# Altium PCB Signal_Integrity_4L.PcbDoc
Units mm, origin at the board's own origin, x right, y up, seen from the top; angles counter-clockwise.
Board outline 110 x 120 mm, 4 copper layers (Top Layer 1, GND1, Signal, Bottom Layer 1), stack 1.586 mm thick; 18 components, 16 nets, 78 pads, 1052 vias.
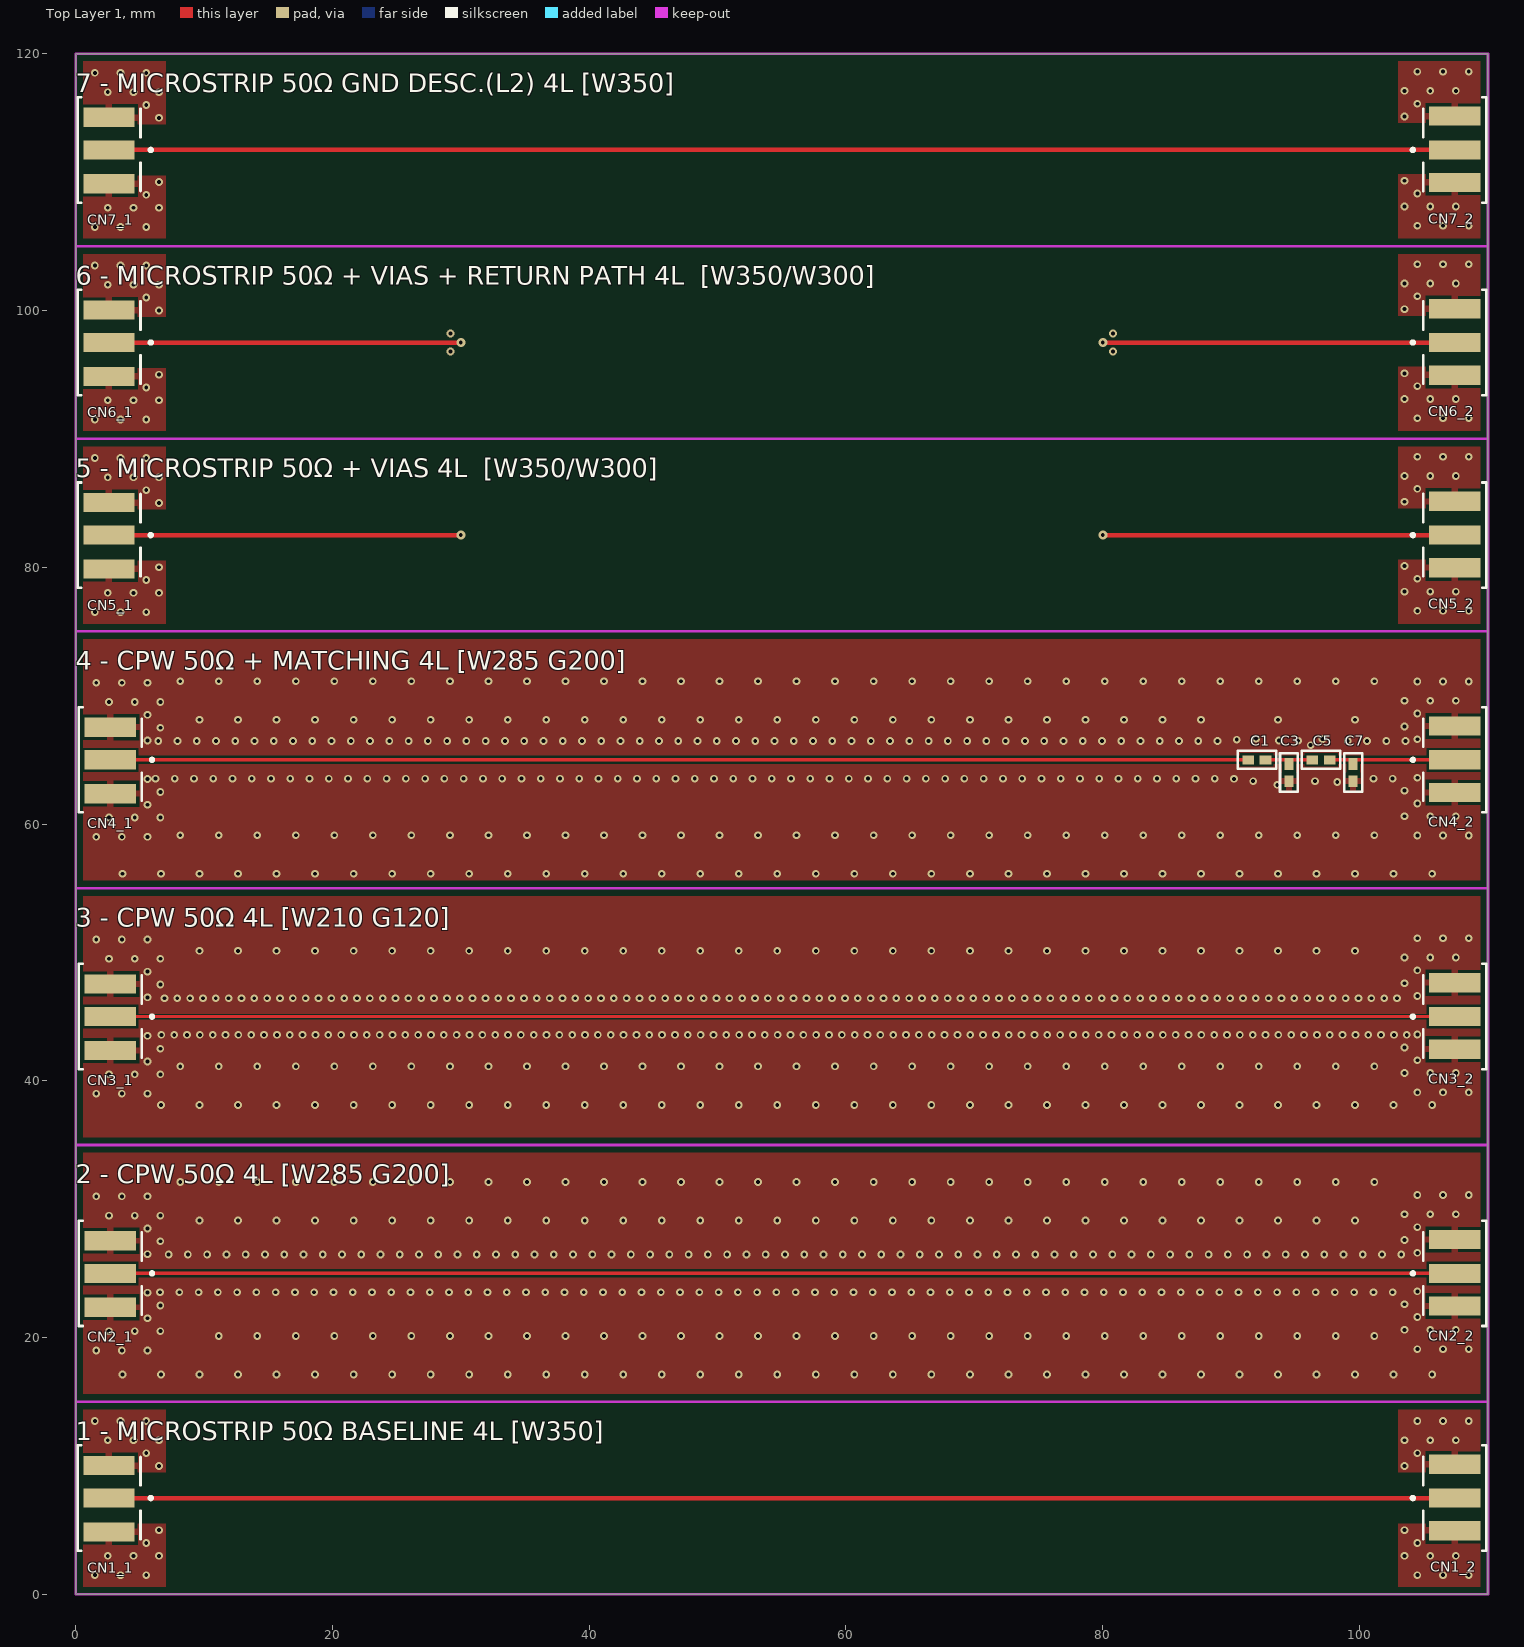
[diagram p0: Top Layer 1 view]
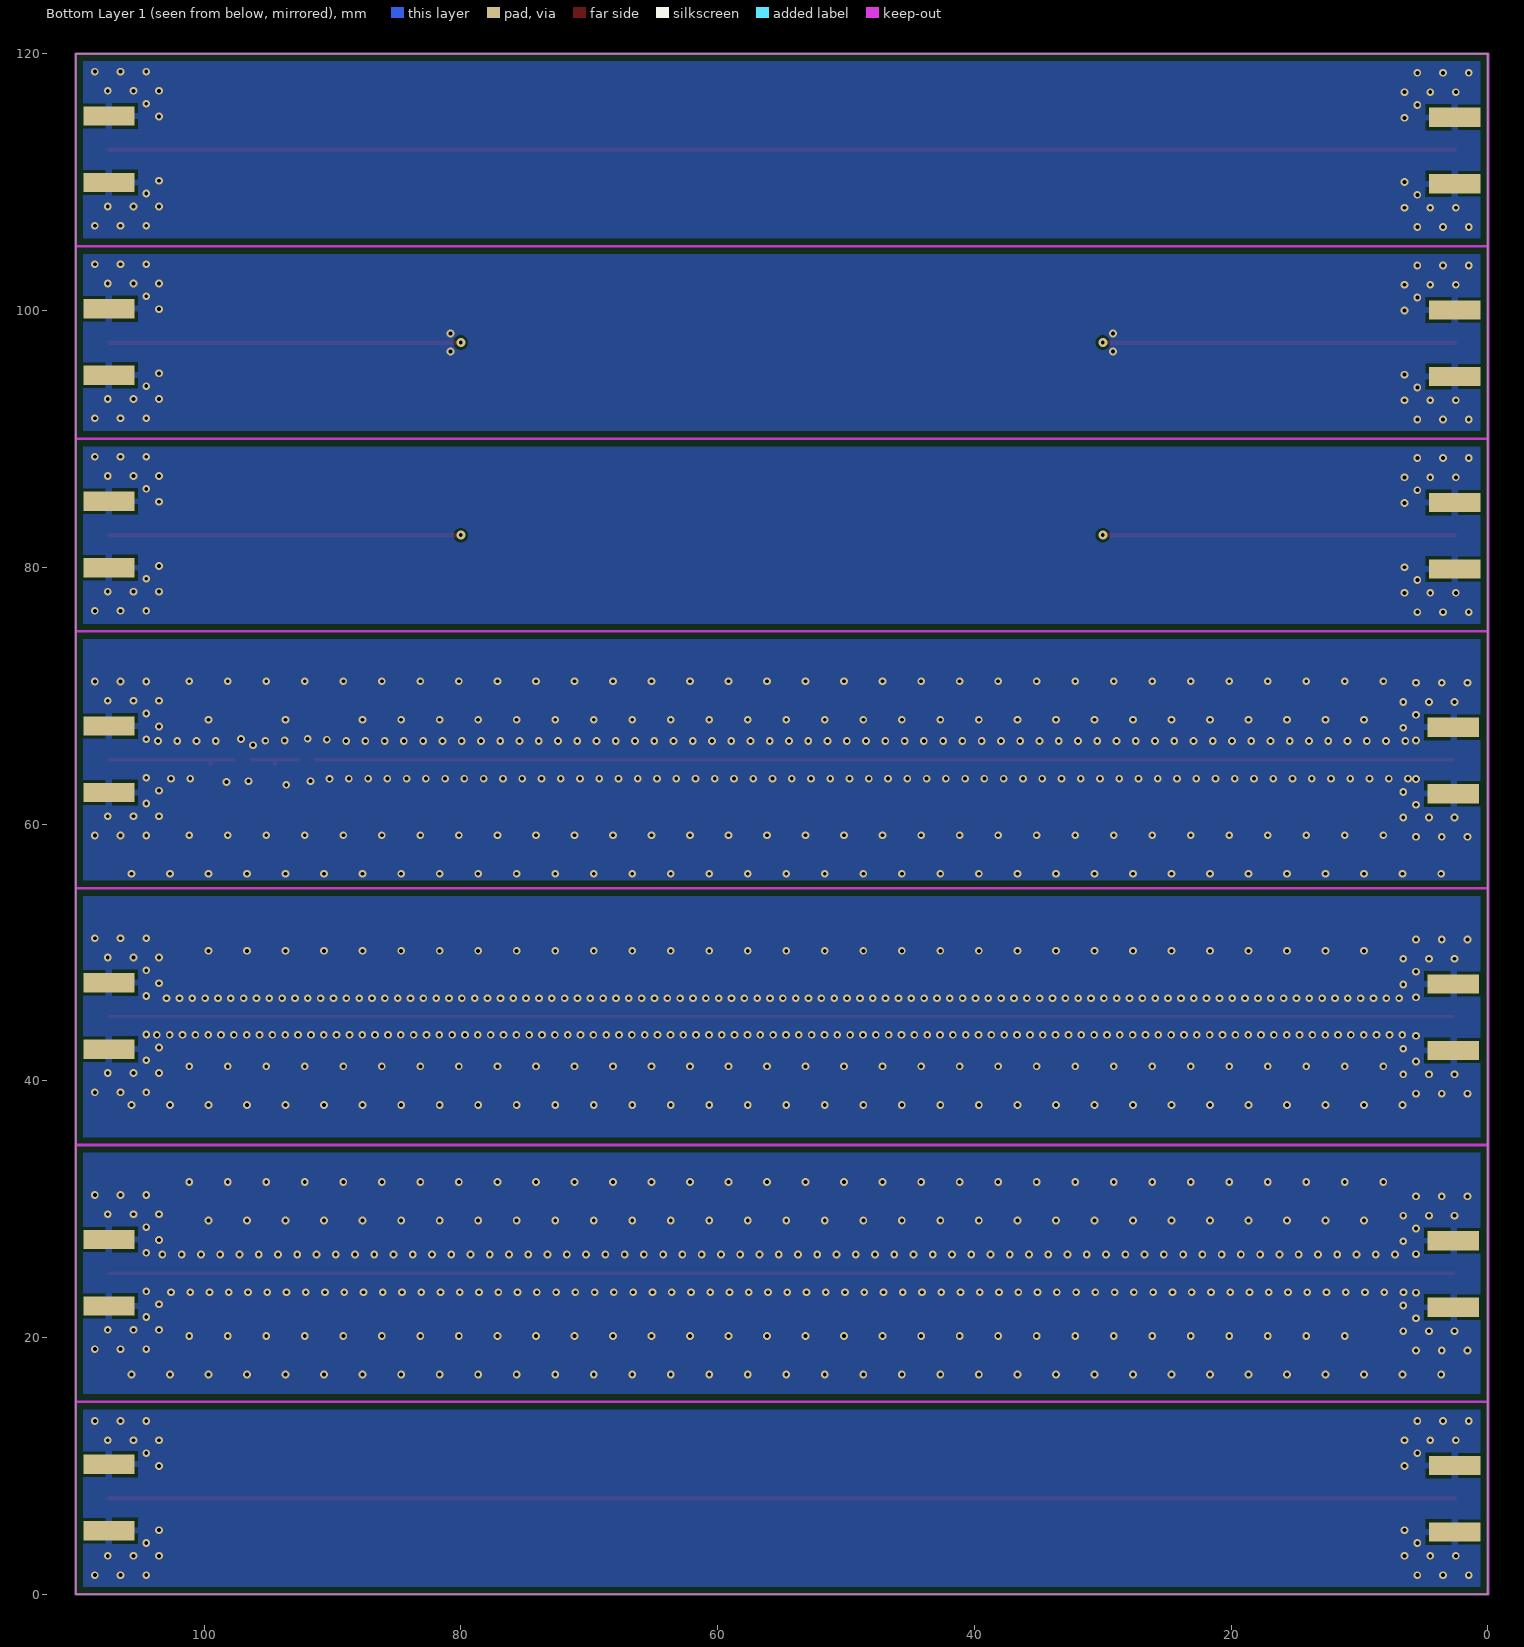
[diagram p1: Bottom Layer 1 view, seen from below]
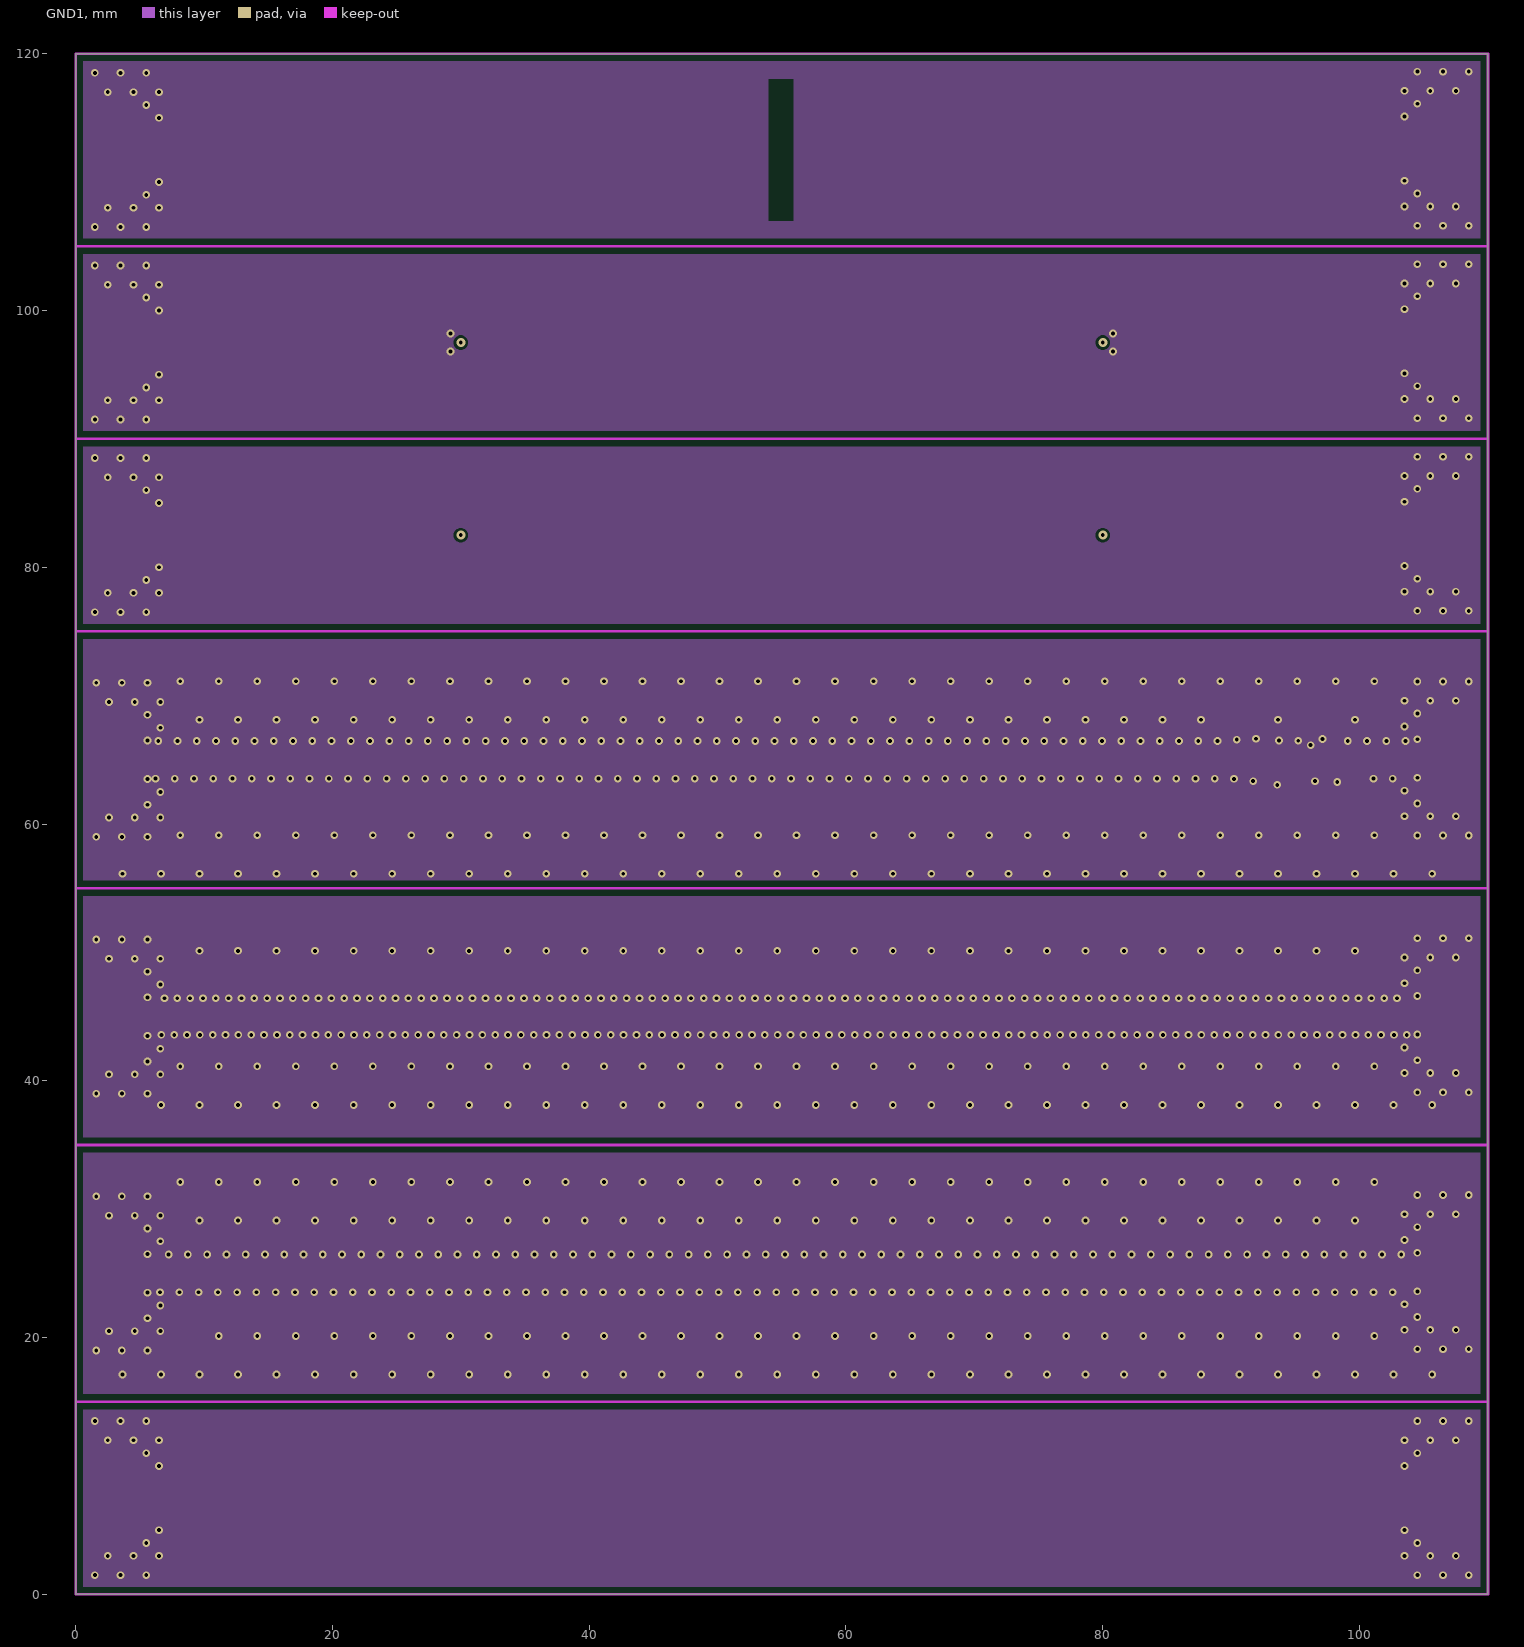
[diagram p2: GND1]
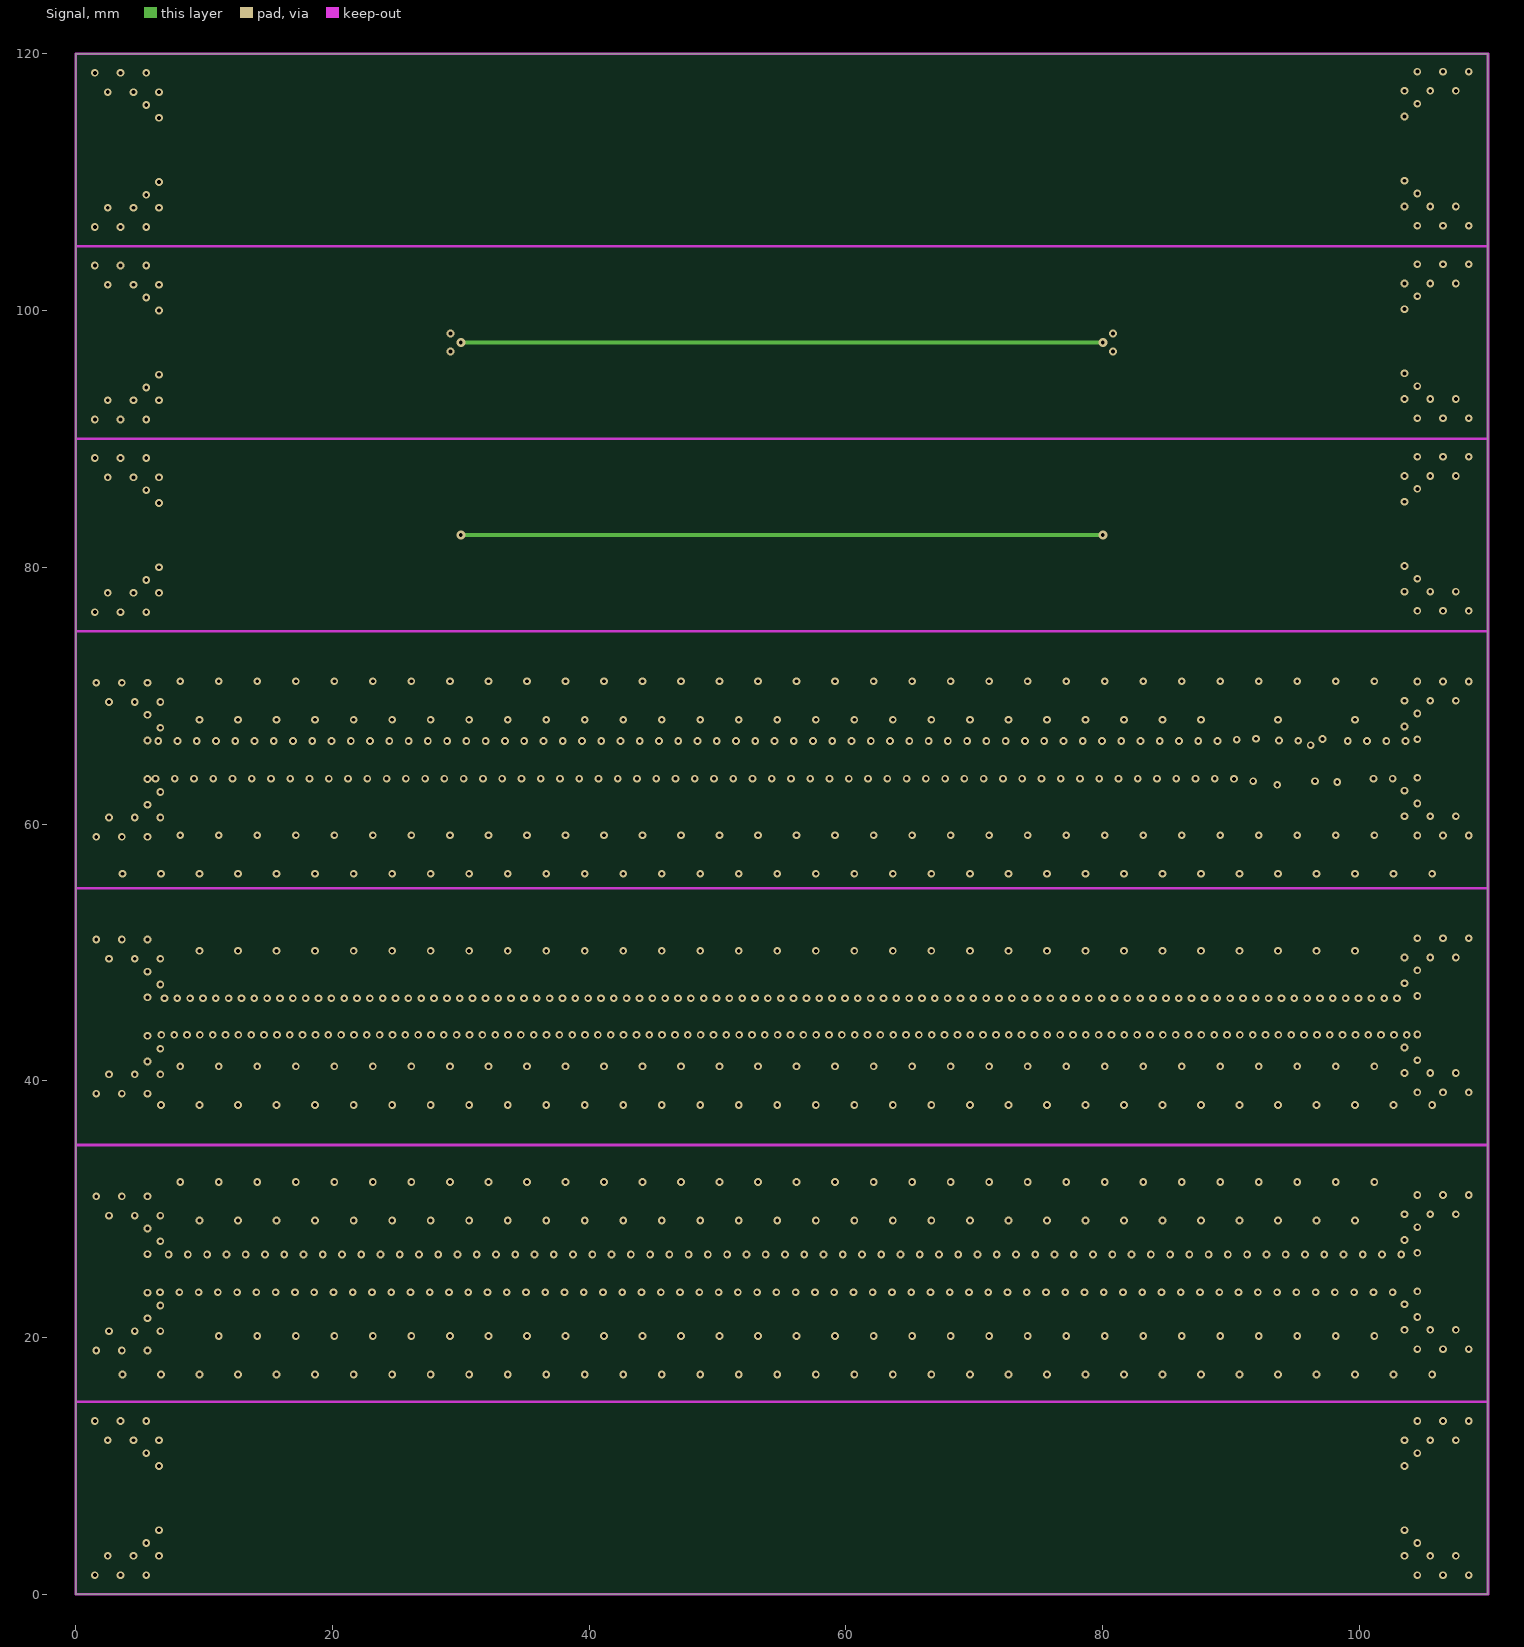
[diagram p3: Signal]
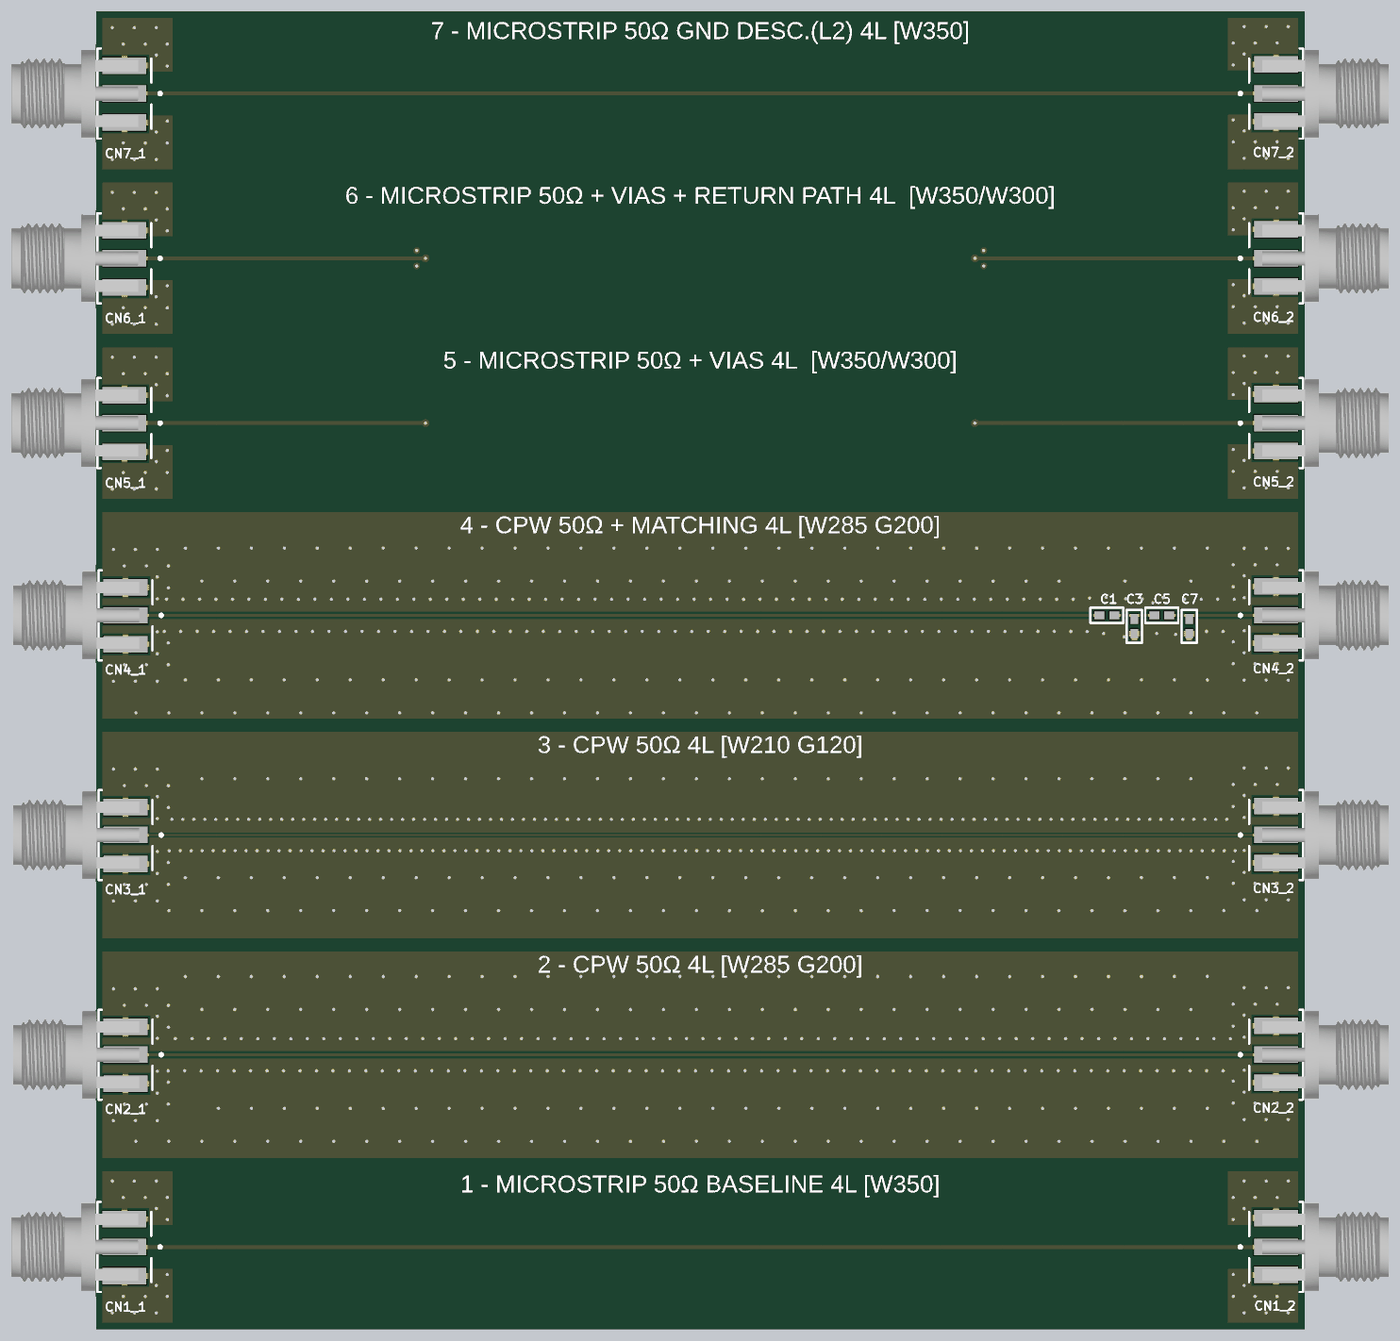
[diagram p4: 3D render of the assembled board from above, using the file's embedded part models]

## Layer stack, top to bottom
Top Solder: solder mask 0.0305, Solder Resist, Dk 3.8
Top Layer 1: signal copper 0.035
7628-1: prepreg 0.2104, PP-023, Dk 4.4
GND1: signal copper 0.0152
Dielectric 1: core 1.065, FR-4, Dk 4.6
Signal: signal copper 0.0152
7628-2: prepreg 0.2104, PP-023, Dk 4.4
Bottom Layer 1: signal copper 0.035
Bottom Solder: solder mask 0.0305, Solder Resist, Dk 3.8

## Board outline
0,0 0,120 110,120 110,0

## Design rules (kind name [scope] priority, off if disabled: settings)
Clearance Clearance_KO [OnLayer('Keep-Out Layer')] p1: gap=0.5 ignorepadtopadclearanceinfootprint=FALSE
Clearance Clearance_SC50_G120 [InNetClass('SC50_G120')] p2: gap=0.2 ignorepadtopadclearanceinfootprint=FALSE except(0.12: Arc-Fill Arc-Poly Arc-Region Track-Fill Track-Poly Track-Region)
Clearance Clearance_DP90 [InDifferentialPairClass('DP90') or InDifferentialPairClass('DPC90')] p3: gap=0.2 ignorepadtopadclearanceinfootprint=FALSE except(0.12: Arc-Arc Arc-Track Arc-Fill Arc-Poly Arc-Region Track-Track Track-Fill Track-Poly Track-Region)
Clearance [All] p4: gap=0.2 ignorepadtopadclearanceinfootprint=FALSE except(0.5: Fill-Fill Fill-Poly Fill-Region Poly-Poly Poly-Region Region-Region)
DiffPairsRouting DiffPairsRouting_DC90 [InDifferentialPairClass('DPC90')] p1: maxlimit=0.13 minlimit=0.13 mostfreqgap=0.13 toplayer_minwidth=0.16 toplayer_maxwidth=0.16 toplayer_prefwidth=0.16 midlayer1_minwidth=0.13 midlayer1_maxwidth=0.13 midlayer1_prefwidth=0.13 midlayer2_minwidth=0.13 midlayer2_maxwidth=0.13 midlayer2_prefwidth=0.13 bottomlayer_minwidth=0.16 bottomlayer_maxwidth=0.16 bottomlayer_prefwidth=0.16 impedanceprofiledriven=TRUE impedanceprofileid={4EF72ABD-D41F-48C9-AA84-232B5FCD5662} impedanceprofilevalue=90.000000 maxuncoupledlength=12.7
DiffPairsRouting DiffPairsRouting_DP90 [InDifferentialPairClass('DP90')] p2: maxlimit=0.13 minlimit=0.12 mostfreqgap=0.13 toplayer_mingap=0.13 toplayer_minwidth=0.2 toplayer_maxwidth=0.2 toplayer_prefwidth=0.2 midlayer1_maxgap=0.12 midlayer1_prefgap=0.12 midlayer1_minwidth=0.15 midlayer1_maxwidth=0.15 midlayer1_prefwidth=0.15 midlayer2_maxgap=0.12 midlayer2_prefgap=0.12 midlayer2_minwidth=0.15 midlayer2_maxwidth=0.15 midlayer2_prefwidth=0.15 bottomlayer_mingap=0.13 bottomlayer_minwidth=0.2 bottomlayer_maxwidth=0.2 bottomlayer_prefwidth=0.2 impedanceprofiledriven=TRUE impedanceprofileid={4D052417-7419-4060-914B-08419BBAABC2} impedanceprofilevalue=90.000000 maxuncoupledlength=12.7
Height [All] p1: minheight=0 maxheight=40 prefheight=12.7
HoleSize [All] p1: absolutevalues=TRUE maxlimit=5 minlimit=0.2 maxpercent=80.000 minpercent=20.000
MinimumSolderMaskSliver [All] p1: minsoldermaskwidth=0.12
PolygonConnect [All] p1: thpad.connectstyle=Relief thpad.reliefconductorwidth=0.254 thpad.reliefentries=4 thpad.polygonreliefangle="90 Angle" thpad.airgapwidth=0.254 smdpad.connectstyle=Relief smdpad.reliefconductorwidth=0.5 smdpad.reliefentries=4 smdpad.polygonreliefangle="90 Angle" smdpad.airgapwidth=0.254 via.connectstyle=Direct via.reliefconductorwidth=0.254 via.reliefentries=4 via.polygonreliefangle="90 Angle" via.airgapwidth=0.254
RoutingVias [All] p1: holewidth=0.3 width=0.6 viastyle="Through Hole" minholewidth=0.2 minwidth=0.6 maxholewidth=0.5 maxwidth=1
SilkToSilkClearance [All] p1: silktosilkclearance=0.127
SilkToSolderMaskClearance [IsPad] p1: minsilkscreentomaskgap=0.127 clearancetoexposedcopper=TRUE
SolderMaskExpansion SolderMaskExpansion_Tented [IsVia] p1: expansion=0.102 istentingtop=TRUE
SolderMaskExpansion [All] p2: expansion=0.102 istentingtop=FALSE
SupplyNets "Schematic Supply Nets_11" [InNet('GND4')] p1: voltage=0.000
SupplyNets "Schematic Supply Nets_10" [InNet('GND5')] p2: voltage=0.000
SupplyNets "Schematic Supply Nets_9" [InNet('GND1')] p3: voltage=0.000
SupplyNets "Schematic Supply Nets_8" [InNet('GND3')] p4: voltage=0.000
SupplyNets "Schematic Supply Nets_5" [InNet('GND2')] p5: voltage=0.000
SupplyNets "Schematic Supply Nets_4" [InNet('GND7')] p6: voltage=0.000
SupplyNets "Schematic Supply Nets" [InNet('GND6')] p7: voltage=0.000
Width Width_S50 [InNetClass('S50')] p1: maxlimit=0.35 minlimit=0.3 preferedwidth=0.35 toplayer_minwidth=0.35 midlayer1_maxwidth=0.3 midlayer1_prefwidth=0.3 midlayer2_maxwidth=0.3 midlayer2_prefwidth=0.3 bottomlayer_minwidth=0.35 impedanceprofiledriven=TRUE impedanceprofileid={85BB407E-ACC5-421C-8E24-185C8C1FA9EB} impedanceprofilevalue=50.000000 minimp=50.000000 maximp=50.000000 favimp=50.000000
Width Width_SC50_G200 [InNetClass('SC50')] p2: maxlimit=0.285 minlimit=0.18 preferedwidth=0.285 toplayer_minwidth=0.285 bottomlayer_minwidth=0.285 impedanceprofiledriven=TRUE impedanceprofileid={B37FB097-429D-4CF1-A0C8-09DB4BF85B47} impedanceprofilevalue=50.000000 minimp=50.000000 maximp=50.000000 favimp=50.000000
Width Width_SC50_G120 [InNetClass('SC50_G120')] p3: maxlimit=0.21 minlimit=0.18 preferedwidth=0.21 toplayer_minwidth=0.21 bottomlayer_minwidth=0.21 impedanceprofiledriven=TRUE impedanceprofileid={979D10FC-C7C2-44BE-B72E-80F3B42C48E9} impedanceprofilevalue=50.000000 minimp=50.000000 maximp=50.000000 favimp=50.000000
Width [All] p4: maxlimit=3 minlimit=0.2 preferedwidth=0.2 minimp=50.000000 maximp=50.000000 favimp=50.000000
24 further rules are at their usual default settings.

## Classes and differential pairs
net class SC50_G120: CPW_G120_50OHMS
net class S50: MICROSTRIP_50OHMS MICROSTRIP_50OHMS_GND_DESC MICROSTRIP_50OHMS_VIAS MICROSTRIP_50OHMS_VIAS_RP
net class SC50: CPW_G200_50OHMS CPW_G200_50OHMS_MATCH NetC1_2 NetC5_2

## Components (designator, comment, footprint, x,y, rotation, side; value= is the part's Value field where it differs from the comment)
C1 "CAP SMD 0402" 0402 92,65 r0 top
C3 "CAP SMD 0402" 0402 94.5,64 r90 top
C5 "CAP SMD 0402" 0402 97,65 r0 top
C7 "CAP SMD 0402" 0402 99.5,64 r90 top
CN1_1 "SMA-KE EDGE" "SMA-KE EDGE" 2.6,7.5 r270 top
CN1_2 "SMA-KE EDGE" "SMA-KE EDGE" 107.4,7.5 r90 top
CN2_1 "SMA-KE EDGE" "SMA-KE EDGE" 2.7,25 r270 top
CN2_2 "SMA-KE EDGE" "SMA-KE EDGE" 107.4,25 r90 top
CN3_1 "SMA-KE EDGE" "SMA-KE EDGE" 2.7,45 r270 top
CN3_2 "SMA-KE EDGE" "SMA-KE EDGE" 107.4,45 r90 top
CN4_1 "SMA-KE EDGE" "SMA-KE EDGE" 2.7,65 r270 top
CN4_2 "SMA-KE EDGE" "SMA-KE EDGE" 107.4,65 r90 top
CN5_1 "SMA-KE EDGE" "SMA-KE EDGE" 2.6,82.5 r270 top
CN5_2 "SMA-KE EDGE" "SMA-KE EDGE" 107.4,82.5 r90 top
CN6_1 "SMA-KE EDGE" "SMA-KE EDGE" 2.6,97.5 r270 top
CN6_2 "SMA-KE EDGE" "SMA-KE EDGE" 107.4,97.5 r90 top
CN7_1 "SMA-KE EDGE" "SMA-KE EDGE" 2.6,112.5 r270 top
CN7_2 "SMA-KE EDGE" "SMA-KE EDGE" 107.4,112.5 r90 top

## Footprints (in the part's own frame and the unit in brackets; to place one, negate y for a bottom-side part, rotate by r counter-clockwise, add the part's x,y. Pads: shape width x height; smd on the part's side, far side on the other; paste and mask are expansions set on the pad)
0402 [mm]
  rect 0.9x0.7 smd: 1(-0.673,0) 2(0.673,0)
  silkscreen extent -1.5,-0.7 1.5,0.7
"SMA-KE EDGE" [mm]
  rect 1.5x4 smd: 1(0,0) 2(-2.54,0) 2(2.64,0)
  rect 1.5x4 smd far side: 2(-2.54,0) 2(2.64,0)
  silkscreen extent -4.1,-2.45 4.1,3.37, body extent -3.97,-10.25 3.97,1.26, height 4.61

## Part data
C1 C3 C5 C7: "0402"
CN1_1 CN1_2 CN2_1 CN2_2 CN3_1 CN3_2 CN4_1 CN4_2 CN5_1 CN5_2 CN6_1 CN6_2 CN7_1 CN7_2: "SMA Connector Receptacle, Female Socket 50Ohm Board Edge, End Launch Solder", Manufacturer_Name="TE Connectivity", Manufacturer_Part_Number=CONSMA020.062-G, Mouser Part Number=712-CONSMA020.062-G, Datasheet Link=https://componentsearchengine.com/Datasheets/1/CONSMA020.062-G.pdf, Geometry.Height=7.92mm, Mouser Price/Stock=https://www.mouser.co.uk/ProductDetail/Linx-Technologies/CONSMA020.062-G?qs=xZ%2FP%252Ba9zWqa7zEs9%2FuMaNQ%3D%3D

## Via types
v1: diameter 0.6, hole 0.3, Top Layer 1 to Bottom Layer 1, tented both sides, 1048 vias
v2: diameter 0.7, hole 0.3, Top Layer 1 to Bottom Layer 1, tented both sides, 4 vias

## Nets (pads, with @x,y where several pads share a name; then routed paths per layer and width w, separated by ;. In a path a pad name is that pad's centre, name@x,y a point inside that pad or via, vN(x,y) a via of type N, cw(c..) or ccw(c..) an arc to the next point about the centre after c; other vN are vias at no path point)
CPW_G120_50OHMS: CN3_1.1 CN3_2.1 | length 104.7
  Top Layer 1 w0.21: CN3_1.1 CN3_2.1
CPW_G200_50OHMS: CN2_1.1 CN2_2.1 | length 104.7
  Top Layer 1 w0.285: CN2_1.1 CN2_2.1
CPW_G200_50OHMS_MATCH: C1.1 CN4_1.1 | length 88.6
  Top Layer 1 w0.285: CN4_1.1 C1.1
GND1: CN1_1.2 CN1_2.2
  other v1: 1.5,1.5 3.5,1.5 5.5,1.5 104.5,1.5 106.5,1.5 108.5,1.5 2.5,3 4.5,3 6.5,3 103.5,3 105.5,3 107.5,3 5.5,4 104.5,4 6.5,5 103.5,5 6.5,10 103.5,10 5.5,11 104.5,11 2.5,12 4.5,12 6.5,12 103.5,12 105.5,12 107.5,12 1.5,13.5 3.5,13.5 5.5,13.5 104.5,13.5 106.5,13.5 108.5,13.5
GND2: CN2_1.2 CN2_2.2
  other v1: 3.65,17.121 6.65,17.121 9.65,17.121 12.65,17.121 15.65,17.121 18.65,17.121 21.65,17.121 24.65,17.121 27.65,17.121 30.65,17.121 33.65,17.121 36.65,17.121 39.65,17.121 42.65,17.121 45.65,17.121 48.65,17.121 51.65,17.121 54.65,17.121 57.65,17.121 60.65,17.121 63.65,17.121 66.65,17.121 69.65,17.121 72.65,17.121 75.65,17.121 78.65,17.121 81.65,17.121 84.65,17.121 87.65,17.121 90.65,17.121 93.65,17.121 96.65,17.121 99.65,17.121 102.65,17.121 105.65,17.121 1.6,19 3.6,19 5.6,19 104.5,19.1 106.5,19.1 108.5,19.1 11.15,20.121 14.15,20.121 17.15,20.121 20.15,20.121 23.15,20.121 26.15,20.121 29.15,20.121 32.15,20.121 35.15,20.121 38.15,20.121 41.15,20.121 44.15,20.121 47.15,20.121 50.15,20.121 53.15,20.121 56.15,20.121 59.15,20.121 62.15,20.121 65.15,20.121 68.15,20.121 71.15,20.121 74.15,20.121 77.15,20.121 80.15,20.121 83.15,20.121 86.15,20.121 89.15,20.121 92.15,20.121 95.15,20.121 98.15,20.121 101.15,20.121 2.6,20.5 4.6,20.5 6.6,20.5 103.5,20.6 105.5,20.6 107.5,20.6 5.6,21.5 104.5,21.6 6.6,22.5 103.5,22.6 5.6,23.5 6.578,23.535 8.078,23.535 9.578,23.535 11.078,23.535 12.578,23.535 14.078,23.535 15.578,23.535 17.078,23.535 18.578,23.535 20.078,23.535 21.578,23.535 23.078,23.535 24.578,23.535 26.078,23.535 27.578,23.535 29.078,23.535 30.578,23.535 32.078,23.535 33.578,23.535 35.078,23.535 36.578,23.535 38.078,23.535 39.578,23.535 41.078,23.535 42.578,23.535 44.078,23.535 45.578,23.535 47.078,23.535 48.578,23.535 50.078,23.535 51.578,23.535 53.078,23.535 54.578,23.535 56.078,23.535 57.578,23.535 59.078,23.535 60.578,23.535 62.078,23.535 63.578,23.535 65.078,23.535 66.578,23.535 68.078,23.535 69.578,23.535 71.078,23.535 72.578,23.535 74.078,23.535 75.578,23.535 77.078,23.535 78.578,23.535 80.078,23.535 81.578,23.535 83.078,23.535 84.578,23.535 86.078,23.535 87.578,23.535 89.078,23.535 90.578,23.535 92.078,23.535 93.578,23.535 95.078,23.535 96.578,23.535 98.078,23.535 99.578,23.535 101.078,23.535 102.578,23.535 104.5,23.6 7.243,26.465 8.743,26.465 10.243,26.465 11.743,26.465 13.243,26.465 14.743,26.465 16.243,26.465 17.743,26.465 19.243,26.465 20.743,26.465 22.243,26.465 23.743,26.465 25.243,26.465 26.743,26.465 28.243,26.465 29.743,26.465 31.243,26.465 32.743,26.465 34.243,26.465 35.743,26.465 37.243,26.465 38.743,26.465 40.243,26.465 41.743,26.465 43.243,26.465 44.743,26.465 46.243,26.465 47.743,26.465 49.243,26.465 50.743,26.465 52.243,26.465 53.743,26.465 55.243,26.465 56.743,26.465 58.243,26.465 59.743,26.465 61.243,26.465 62.743,26.465 64.243,26.465 65.743,26.465 67.243,26.465 68.743,26.465 70.243,26.465 71.743,26.465 73.243,26.465 74.743,26.465 76.243,26.465 77.743,26.465 79.243,26.465 80.743,26.465 82.243,26.465 83.743,26.465 85.243,26.465 86.743,26.465 88.243,26.465 89.743,26.465 91.243,26.465 92.743,26.465 94.243,26.465 95.743,26.465 97.243,26.465 98.743,26.465 100.243,26.465 101.743,26.465 103.243,26.465 5.6,26.5 104.5,26.6 6.6,27.5 103.5,27.6 5.6,28.5 104.5,28.6 9.65,29.121 12.65,29.121 15.65,29.121 18.65,29.121 21.65,29.121 24.65,29.121 27.65,29.121 30.65,29.121 33.65,29.121 36.65,29.121 39.65,29.121 42.65,29.121 45.65,29.121 48.65,29.121 51.65,29.121 54.65,29.121 57.65,29.121 60.65,29.121 63.65,29.121 66.65,29.121 69.65,29.121 72.65,29.121 75.65,29.121 78.65,29.121 81.65,29.121 84.65,29.121 87.65,29.121 90.65,29.121 93.65,29.121 96.65,29.121 99.65,29.121 2.6,29.5 4.6,29.5 6.6,29.5 103.5,29.6 105.5,29.6 107.5,29.6 1.6,31 3.6,31 5.6,31 104.5,31.1 106.5,31.1 108.5,31.1 8.15,32.121 11.15,32.121 14.15,32.121 17.15,32.121 20.15,32.121 23.15,32.121 26.15,32.121 29.15,32.121 32.15,32.121 35.15,32.121 38.15,32.121 41.15,32.121 44.15,32.121 47.15,32.121 50.15,32.121 53.15,32.121 56.15,32.121 59.15,32.121 62.15,32.121 65.15,32.121 68.15,32.121 71.15,32.121 74.15,32.121 77.15,32.121 80.15,32.121 83.15,32.121 86.15,32.121 89.15,32.121 92.15,32.121 95.15,32.121 98.15,32.121 101.15,32.121
GND3: CN3_1.2 CN3_2.2
  other v1: 6.65,38.121 9.65,38.121 12.65,38.121 15.65,38.121 18.65,38.121 21.65,38.121 24.65,38.121 27.65,38.121 30.65,38.121 33.65,38.121 36.65,38.121 39.65,38.121 42.65,38.121 45.65,38.121 48.65,38.121 51.65,38.121 54.65,38.121 57.65,38.121 60.65,38.121 63.65,38.121 66.65,38.121 69.65,38.121 72.65,38.121 75.65,38.121 78.65,38.121 81.65,38.121 84.65,38.121 87.65,38.121 90.65,38.121 93.65,38.121 96.65,38.121 99.65,38.121 102.65,38.121 105.65,38.121 1.6,39 3.6,39 5.6,39 104.5,39.1 106.5,39.1 108.5,39.1 2.6,40.5 4.6,40.5 6.6,40.5 103.5,40.6 105.5,40.6 107.5,40.6 8.15,41.121 11.15,41.121 14.15,41.121 17.15,41.121 20.15,41.121 23.15,41.121 26.15,41.121 29.15,41.121 32.15,41.121 35.15,41.121 38.15,41.121 41.15,41.121 44.15,41.121 47.15,41.121 50.15,41.121 53.15,41.121 56.15,41.121 59.15,41.121 62.15,41.121 65.15,41.121 68.15,41.121 71.15,41.121 74.15,41.121 77.15,41.121 80.15,41.121 83.15,41.121 86.15,41.121 89.15,41.121 92.15,41.121 95.15,41.121 98.15,41.121 101.15,41.121 5.6,41.5 104.5,41.6 6.6,42.5 103.5,42.6 5.6,43.5 6.676,43.575 7.676,43.575 8.676,43.575 9.676,43.575 10.676,43.575 11.676,43.575 12.676,43.575 13.676,43.575 14.676,43.575 15.676,43.575 16.676,43.575 17.676,43.575 18.676,43.575 19.676,43.575 20.676,43.575 21.676,43.575 22.676,43.575 23.676,43.575 24.676,43.575 25.676,43.575 26.676,43.575 27.676,43.575 28.676,43.575 29.676,43.575 30.676,43.575 31.676,43.575 32.676,43.575 33.676,43.575 34.676,43.575 35.676,43.575 36.676,43.575 37.676,43.575 38.676,43.575 39.676,43.575 40.676,43.575 41.676,43.575 42.676,43.575 43.676,43.575 44.676,43.575 45.676,43.575 46.676,43.575 47.676,43.575 48.676,43.575 49.676,43.575 50.676,43.575 51.676,43.575 52.676,43.575 53.676,43.575 54.676,43.575 55.676,43.575 56.676,43.575 57.676,43.575 58.676,43.575 59.676,43.575 60.676,43.575 61.676,43.575 62.676,43.575 63.676,43.575 64.676,43.575 65.676,43.575 66.676,43.575 67.676,43.575 68.676,43.575 69.676,43.575 70.676,43.575 71.676,43.575 72.676,43.575 73.676,43.575 74.676,43.575 75.676,43.575 76.676,43.575 77.676,43.575 78.676,43.575 79.676,43.575 80.676,43.575 81.676,43.575 82.676,43.575 83.676,43.575 84.676,43.575 85.676,43.575 86.676,43.575 87.676,43.575 88.676,43.575 89.676,43.575 90.676,43.575 91.676,43.575 92.676,43.575 93.676,43.575 94.676,43.575 95.676,43.575 96.676,43.575 97.676,43.575 98.676,43.575 99.676,43.575 100.676,43.575 101.676,43.575 102.676,43.575 103.676,43.575 104.5,43.6 6.916,46.425 7.916,46.425 8.916,46.425 9.916,46.425 10.916,46.425 11.916,46.425 12.916,46.425 13.916,46.425 14.916,46.425 15.916,46.425 16.916,46.425 17.916,46.425 18.916,46.425 19.916,46.425 20.916,46.425 21.916,46.425 22.916,46.425 23.916,46.425 24.916,46.425 25.916,46.425 26.916,46.425 27.916,46.425 28.916,46.425 29.916,46.425 30.916,46.425 31.916,46.425 32.916,46.425 33.916,46.425 34.916,46.425 35.916,46.425 36.916,46.425 37.916,46.425 38.916,46.425 39.916,46.425 40.916,46.425 41.916,46.425 42.916,46.425 43.916,46.425 44.916,46.425 45.916,46.425 46.916,46.425 47.916,46.425 48.916,46.425 49.916,46.425 50.916,46.425 51.916,46.425 52.916,46.425 53.916,46.425 54.916,46.425 55.916,46.425 56.916,46.425 57.916,46.425 58.916,46.425 59.916,46.425 60.916,46.425 61.916,46.425 62.916,46.425 63.916,46.425 64.916,46.425 65.916,46.425 66.916,46.425 67.916,46.425 68.916,46.425 69.916,46.425 70.916,46.425 71.916,46.425 72.916,46.425 73.916,46.425 74.916,46.425 75.916,46.425 76.916,46.425 77.916,46.425 78.916,46.425 79.916,46.425 80.916,46.425 81.916,46.425 82.916,46.425 83.916,46.425 84.916,46.425 85.916,46.425 86.916,46.425 87.916,46.425 88.916,46.425 89.916,46.425 90.916,46.425 91.916,46.425 92.916,46.425 93.916,46.425 94.916,46.425 95.916,46.425 96.916,46.425 97.916,46.425 98.916,46.425 99.916,46.425 100.916,46.425 101.916,46.425 102.916,46.425 5.6,46.5 104.5,46.6 6.6,47.5 103.5,47.6 5.6,48.5 104.5,48.6 2.6,49.5 4.6,49.5 6.6,49.5 103.5,49.6 105.5,49.6 107.5,49.6 9.65,50.121 12.65,50.121 15.65,50.121 18.65,50.121 21.65,50.121 24.65,50.121 27.65,50.121 30.65,50.121 33.65,50.121 36.65,50.121 39.65,50.121 42.65,50.121 45.65,50.121 48.65,50.121 51.65,50.121 54.65,50.121 57.65,50.121 60.65,50.121 63.65,50.121 66.65,50.121 69.65,50.121 72.65,50.121 75.65,50.121 78.65,50.121 81.65,50.121 84.65,50.121 87.65,50.121 90.65,50.121 93.65,50.121 96.65,50.121 99.65,50.121 1.6,51 3.6,51 5.6,51 104.5,51.1 106.5,51.1 108.5,51.1
GND4: C3.1 C7.1 CN4_1.2 CN4_2.2
  other v1: 3.65,56.121 6.65,56.121 9.65,56.121 12.65,56.121 15.65,56.121 18.65,56.121 21.65,56.121 24.65,56.121 27.65,56.121 30.65,56.121 33.65,56.121 36.65,56.121 39.65,56.121 42.65,56.121 45.65,56.121 48.65,56.121 51.65,56.121 54.65,56.121 57.65,56.121 60.65,56.121 63.65,56.121 66.65,56.121 69.65,56.121 72.65,56.121 75.65,56.121 78.65,56.121 81.65,56.121 84.65,56.121 87.65,56.121 90.65,56.121 93.65,56.121 96.65,56.121 99.65,56.121 102.65,56.121 105.65,56.121 1.6,59 3.6,59 5.6,59 104.5,59.1 106.5,59.1 108.5,59.1 8.15,59.121 11.15,59.121 14.15,59.121 17.15,59.121 20.15,59.121 23.15,59.121 26.15,59.121 29.15,59.121 32.15,59.121 35.15,59.121 38.15,59.121 41.15,59.121 44.15,59.121 47.15,59.121 50.15,59.121 53.15,59.121 56.15,59.121 59.15,59.121 62.15,59.121 65.15,59.121 68.15,59.121 71.15,59.121 74.15,59.121 77.15,59.121 80.15,59.121 83.15,59.121 86.15,59.121 89.15,59.121 92.15,59.121 95.15,59.121 98.15,59.121 101.15,59.121 2.6,60.5 4.6,60.5 6.6,60.5 103.5,60.6 105.5,60.6 107.5,60.6 5.6,61.5 104.5,61.6 6.6,62.5 103.5,62.6 93.592,63.047 98.256,63.27 91.711,63.339 96.536,63.339 5.6,63.5 90.221,63.515 6.221,63.535 7.721,63.535 9.221,63.535 10.721,63.535 12.221,63.535 13.721,63.535 15.221,63.535 16.721,63.535 18.221,63.535 19.721,63.535 21.221,63.535 22.721,63.535 24.221,63.535 25.721,63.535 27.221,63.535 28.721,63.535 30.221,63.535 31.721,63.535 33.221,63.535 34.721,63.535 36.221,63.535 37.721,63.535 39.221,63.535 40.721,63.535 42.221,63.535 43.721,63.535 45.221,63.535 46.721,63.535 48.221,63.535 49.721,63.535 51.221,63.535 52.721,63.535 54.221,63.535 55.721,63.535 57.221,63.535 58.721,63.535 60.221,63.535 61.721,63.535 63.221,63.535 64.721,63.535 66.221,63.535 67.721,63.535 69.221,63.535 70.721,63.535 72.221,63.535 73.721,63.535 75.221,63.535 76.721,63.535 78.221,63.535 79.721,63.535 81.221,63.535 82.721,63.535 84.221,63.535 85.721,63.535 87.221,63.535 88.721,63.535 101.078,63.535 102.578,63.535 104.5,63.6 96.191,66.14 6.434,66.465 7.934,66.465 9.434,66.465 10.934,66.465 12.434,66.465 13.934,66.465 15.434,66.465 16.934,66.465 18.434,66.465 19.934,66.465 21.434,66.465 22.934,66.465 24.434,66.465 25.934,66.465 27.434,66.465 28.934,66.465 30.434,66.465 31.934,66.465 33.434,66.465 34.934,66.465 36.434,66.465 37.934,66.465 39.434,66.465 40.934,66.465 42.434,66.465 43.934,66.465 45.434,66.465 46.934,66.465 48.434,66.465 49.934,66.465 51.434,66.465 52.934,66.465 54.434,66.465 55.934,66.465 57.434,66.465 58.934,66.465 60.434,66.465 61.934,66.465 63.434,66.465 64.934,66.465 66.434,66.465 67.934,66.465 69.434,66.465 70.934,66.465 72.434,66.465 73.934,66.465 75.434,66.465 76.934,66.465 78.434,66.465 79.934,66.465 81.434,66.465 82.934,66.465 84.434,66.465 85.934,66.465 87.434,66.465 88.934,66.465 99.084,66.465 100.584,66.465 102.084,66.465 103.584,66.465 95.222,66.486 5.6,66.5 93.722,66.509 90.431,66.572 104.5,66.6 97.116,66.617 91.929,66.641 6.6,67.5 103.5,67.6 9.65,68.121 12.65,68.121 15.65,68.121 18.65,68.121 21.65,68.121 24.65,68.121 27.65,68.121 30.65,68.121 33.65,68.121 36.65,68.121 39.65,68.121 42.65,68.121 45.65,68.121 48.65,68.121 51.65,68.121 54.65,68.121 57.65,68.121 60.65,68.121 63.65,68.121 66.65,68.121 69.65,68.121 72.65,68.121 75.65,68.121 78.65,68.121 81.65,68.121 84.65,68.121 87.65,68.121 93.65,68.121 99.65,68.121 5.6,68.5 104.5,68.6 2.6,69.5 4.6,69.5 6.6,69.5 103.5,69.6 105.5,69.6 107.5,69.6 1.6,71 3.6,71 5.6,71 8.15,71.121 11.15,71.121 14.15,71.121 17.15,71.121 20.15,71.121 23.15,71.121 26.15,71.121 29.15,71.121 32.15,71.121 35.15,71.121 38.15,71.121 41.15,71.121 44.15,71.121 47.15,71.121 50.15,71.121 53.15,71.121 56.15,71.121 59.15,71.121 62.15,71.121 65.15,71.121 68.15,71.121 71.15,71.121 74.15,71.121 77.15,71.121 80.15,71.121 83.15,71.121 86.15,71.121 89.15,71.121 92.15,71.121 95.15,71.121 98.15,71.121 101.15,71.121 104.5,71.1 106.5,71.1 108.5,71.1
GND5: CN5_1.2 CN5_2.2
  other v1: 1.5,76.5 3.5,76.5 5.5,76.5 104.5,76.6 106.5,76.6 108.5,76.6 2.5,78 4.5,78 6.5,78 103.5,78.1 105.5,78.1 107.5,78.1 5.5,79 104.5,79.1 6.5,80 103.5,80.1 6.5,85 103.5,85.1 5.5,86 104.5,86.1 2.5,87 4.5,87 6.5,87 103.5,87.1 105.5,87.1 107.5,87.1 1.5,88.5 3.5,88.5 5.5,88.5 104.5,88.6 106.5,88.6 108.5,88.6
GND6: CN6_1.2 CN6_2.2
  other v1: 1.5,91.5 3.5,91.5 5.5,91.5 104.5,91.6 106.5,91.6 108.5,91.6 2.5,93 4.5,93 6.5,93 103.5,93.1 105.5,93.1 107.5,93.1 5.5,94 104.5,94.1 6.5,95 103.5,95.1 29.2,96.8 80.8,96.8 29.2,98.2 80.8,98.2 6.5,100 103.5,100.1 5.5,101 104.5,101.1 2.5,102 4.5,102 6.5,102 103.5,102.1 105.5,102.1 107.5,102.1 1.5,103.5 3.5,103.5 5.5,103.5 104.5,103.6 106.5,103.6 108.5,103.6
GND7: CN7_1.2 CN7_2.2
  other v1: 1.5,106.5 3.5,106.5 5.5,106.5 104.5,106.6 106.5,106.6 108.5,106.6 2.5,108 4.5,108 6.5,108 103.5,108.1 105.5,108.1 107.5,108.1 5.5,109 104.5,109.1 6.5,110 103.5,110.1 6.5,115 103.5,115.1 5.5,116 104.5,116.1 2.5,117 4.5,117 6.5,117 103.5,117.1 105.5,117.1 107.5,117.1 1.5,118.5 3.5,118.5 5.5,118.5 104.5,118.6 106.5,118.6 108.5,118.6
MICROSTRIP_50OHMS: CN1_1.1 CN1_2.1 | length 104.8
  Top Layer 1 w0.35: CN1_1.1 CN1_2.1
MICROSTRIP_50OHMS_GND_DESC: CN7_1.1 CN7_2.1 | length 104.8
  Top Layer 1 w0.35: CN7_1.1 CN7_2.1
MICROSTRIP_50OHMS_VIAS: CN5_1.1 CN5_2.1 | length 104.8
  Top Layer 1 w0.35: CN5_1.1 v2(30,82.5) ; v2(80,82.5) CN5_2.1
  Signal w0.3: v2(30,82.5) v2(80,82.5)
MICROSTRIP_50OHMS_VIAS_RP: CN6_1.1 CN6_2.1 | length 104.8
  Top Layer 1 w0.35: CN6_1.1 v2(30,97.5) ; v2(80,97.5) CN6_2.1
  Signal w0.3: v2(30,97.5) v2(80,97.5)
NetC1_2: C1.2 C3.2 C5.1 | length 4
  Top Layer 1 w0.285: C1.2 C3.2@94.5,65 ; C3.2 C3.2@94.5,65 ; C5.1 C3.2@94.5,65
NetC5_2: C5.2 C7.2 CN4_2.1 | length 10
  Top Layer 1 w0.285: C5.2 C7.2@99.5,65 ; C7.2 99.5,64.95 C7.2@99.525,64.975 ; C7.2@99.525,65 CN4_2.1

## Polygon pours and split planes (outlines as drawn)
GND5 on GND1 "GND5_L02_P011" (solid, remove dead copper, pour order 11): 0,90 0,75 110,75 110,90
GND1 on GND1 "GND1_L02_P000" (solid, remove dead copper, pour order 0): 0,15 0,0 110,0 110,15
GND2 on GND1 "GND2_L02_P006" (solid, remove dead copper, pour order 6): 0,35 0,15 110,15 110,35
GND3 on GND1 "GND3_L02_P008" (solid, remove dead copper, pour order 8): 0,55 0,35 110,35 110,55
GND4 on GND1 "GND4_L02_P009" (solid, remove dead copper, pour order 9): 0,75 0,55 110,55 110,75
GND6 on GND1 "GND6_L02_P012" (solid, remove dead copper, pour order 12): 0,105 0,90 110,90 110,105
GND7 on GND1 "GND7_L02_P013" (solid, remove dead copper, pour order 13): 0,120 0,105 110,105 110,120
GND5 on Bottom Layer 1 "GND5_L04_P025" (solid, remove dead copper, pour order 25): 0,90 0,75 110,75 110,90
GND2 on Bottom Layer 1 "GND2_L04_P021" (solid, remove dead copper, pour order 21): 0,35 0,15 110,15 110,35
GND7 on Bottom Layer 1 "GND7_L04_P027" (solid, remove dead copper, pour order 27): 0,120 0,105 110,105 110,120
GND6 on Bottom Layer 1 "GND6_L04_P026" (solid, remove dead copper, pour order 26): 0,105 0,90 110,90 110,105
GND4 on Bottom Layer 1 "GND4_L04_P023" (solid, remove dead copper, pour order 23): 0,75 0,55 110,55 110,75
GND3 on Bottom Layer 1 "GND3_L04_P022" (solid, remove dead copper, pour order 22): 0,55 0,35 110,35 110,55
GND1 on Bottom Layer 1 "GND1_L04_P019" (solid, remove dead copper, pour order 19): 0,15 0,0 110,0 110,15
GND7 on Top Layer 1 "GND7_L01_P055" (solid, remove dead copper, pour order 55): 110,105.1 103,105.1 103,110.6 110,110.6
GND7 on Top Layer 1 "GND7_L01_P054" (solid, remove dead copper, pour order 54): 110,120.1 103,120.1 103,114.6 110,114.6
GND6 on Top Layer 1 "GND6_L01_P053" (solid, remove dead copper, pour order 53): 110,90.1 103,90.1 103,95.6 110,95.6
GND6 on Top Layer 1 "GND6_L01_P052" (solid, remove dead copper, pour order 52): 110,105.1 103,105.1 103,99.6 110,99.6
GND5 on Top Layer 1 "GND5_L01_P051" (solid, remove dead copper, pour order 51): 110,75.1 103,75.1 103,80.6 110,80.6
GND5 on Top Layer 1 "GND5_L01_P050" (solid, remove dead copper, pour order 50): 110,90.1 103,90.1 103,84.6 110,84.6
GND7 on Top Layer 1 "GND7_L01_P049" (solid, remove dead copper, pour order 49): 0,105 7,105 7,110.5 0,110.5
GND7 on Top Layer 1 "GND7_L01_P048" (solid, remove dead copper, pour order 48): 0,120 7,120 7,114.5 0,114.5
GND6 on Top Layer 1 "GND6_L01_P047" (solid, remove dead copper, pour order 47): 0,90 7,90 7,95.5 0,95.5
GND6 on Top Layer 1 "GND6_L01_P046" (solid, remove dead copper, pour order 46): 0,105 7,105 7,99.5 0,99.5
GND5 on Top Layer 1 "GND5_L01_P045" (solid, remove dead copper, pour order 45): 0,75 7,75 7,80.5 0,80.5
GND5 on Top Layer 1 "GND5_L01_P044" (solid, remove dead copper, pour order 44): 0,90 7,90 7,84.5 0,84.5
GND1 on Top Layer 1 "GND1_L01_P043" (solid, remove dead copper, pour order 43): 110,0 103,0 103,5.5 110,5.5
GND1 on Top Layer 1 "GND1_L01_P042" (solid, remove dead copper, pour order 42): 110,15 103,15 103,9.5 110,9.5
GND1 on Top Layer 1 "GND1_L01_P041" (solid, remove dead copper, pour order 41): 0,0 7,0 7,5.5 0,5.5
GND1 on Top Layer 1 "GND1_L01_P040" (solid, remove dead copper, pour order 40): 0,15 7,15 7,9.5 0,9.5
GND4 on Top Layer 1 "GND4_L01_P034" (solid, remove dead copper, pour order 34): 0,75 0,55 110,55 110,75
GND2 on Top Layer 1 "GND2_L01_P020" (solid, remove dead copper, pour order 20): 0,35 0,15 110,15 110,35
GND3 on Top Layer 1 "GND3_L01_P033" (solid, remove dead copper, pour order 33): 0,55 0,35 110,35 110,55

## Keep-outs
Keep-Out Layer:
  lines w0.2: 0,15 110,15 ; 0,35 110,35 ; 0,55 110,55 ; 0,75 110,75 ; 0,90 110,90 ; 0,105 110,105 ; 0,120 0,0 110,0 110,120 ; 0,120 110,120 ; 0,120 110,120

## Other copper
GND1:
  pour cut-out: 54,118 54,107 55.9,107 55.9,118

## Silkscreen, mask and mechanical layers (free items; w line width, h text height)
Top Overlay:
  text "7 - MICROSTRIP 50Ω GND DESC.(L2) 4L [W350]" at 0,116.5 h2.5
  text "6 - MICROSTRIP 50Ω + VIAS + RETURN PATH 4L  [W350/W300]" at 0,101.5 h2.5
  text "5 - MICROSTRIP 50Ω + VIAS 4L  [W350/W300]" at 0,86.5 h2.5
  text "4 - CPW 50Ω + MATCHING 4L [W285 G200]" at 0,71.5 h2.5
  text "3 - CPW 50Ω 4L [W210 G120]" at 0,51.5 h2.5
  text "2 - CPW 50Ω 4L [W285 G200]" at 0,31.5 h2.5
  text "1 - MICROSTRIP 50Ω BASELINE 4L [W350]" at 0,11.5 h2.5
Referencias:
  circle w0.254: c78.5,65.5 r3
  circle w0.254: c9.5,65.5 r5
  circle w0.254: c78.5,9.5 r5
  circle w0.254: c9.5,9.5 r5
  circle w0.254: c78.5,65.5 r5
  circle w0.254: c9.5,65.5 r3
  circle w0.254: c9.5,9.5 r3
  circle w0.254: c78.5,9.5 r3
  lines w0.1: 83.3,7 83.3,68.091 ; 3,16 ccw(c15.988,15.988) 15.976,3 74.024,3 ccw(c74.012,15.988) 87,16 87,59 ccw(c74.012,59.012) 74.024,72 15.976,72 ccw(c15.988,59.012) 3,59 3,16

## Dimensions
0,120 to 0,0 on Dimensions
0,0 to 110,0 on Dimensions